# Altium PCB praxis_top_level_pcbdoc_v2_ethernet.PcbDoc
Units mm, origin at the board's own origin, x right, y up, seen from the top; angles counter-clockwise.
Board outline 62.93 x 25.9 mm, 4 copper layers (Top Layer, Int1 (GND), Int2 (PWR), Bottom Layer), stack 1.273 mm thick; 51 components, 266 nets, 142 pads, 68 vias.
Unrouted connection lines stored in the file: 1.
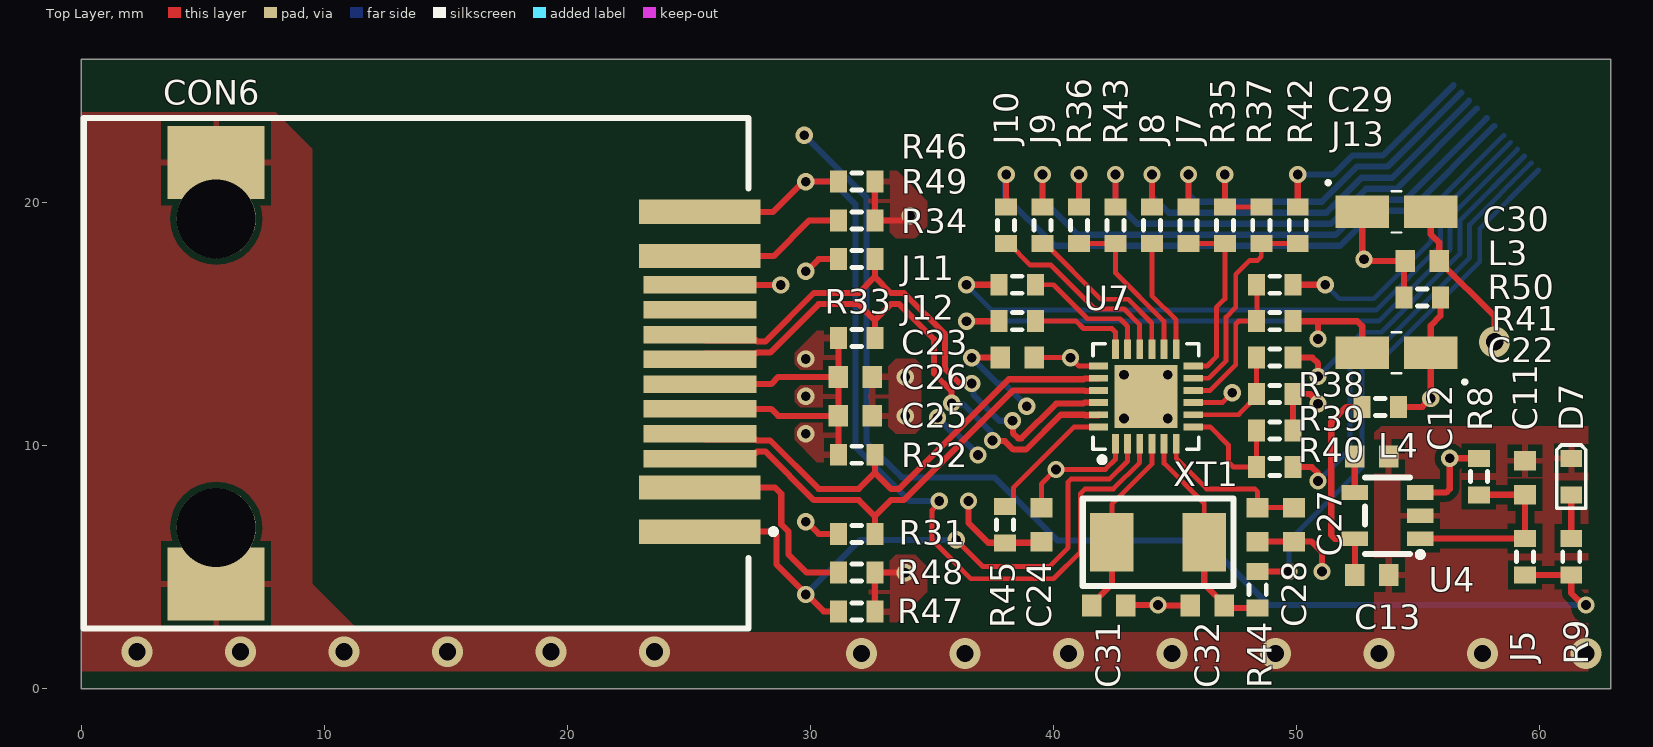
[diagram p0: Top Layer view]
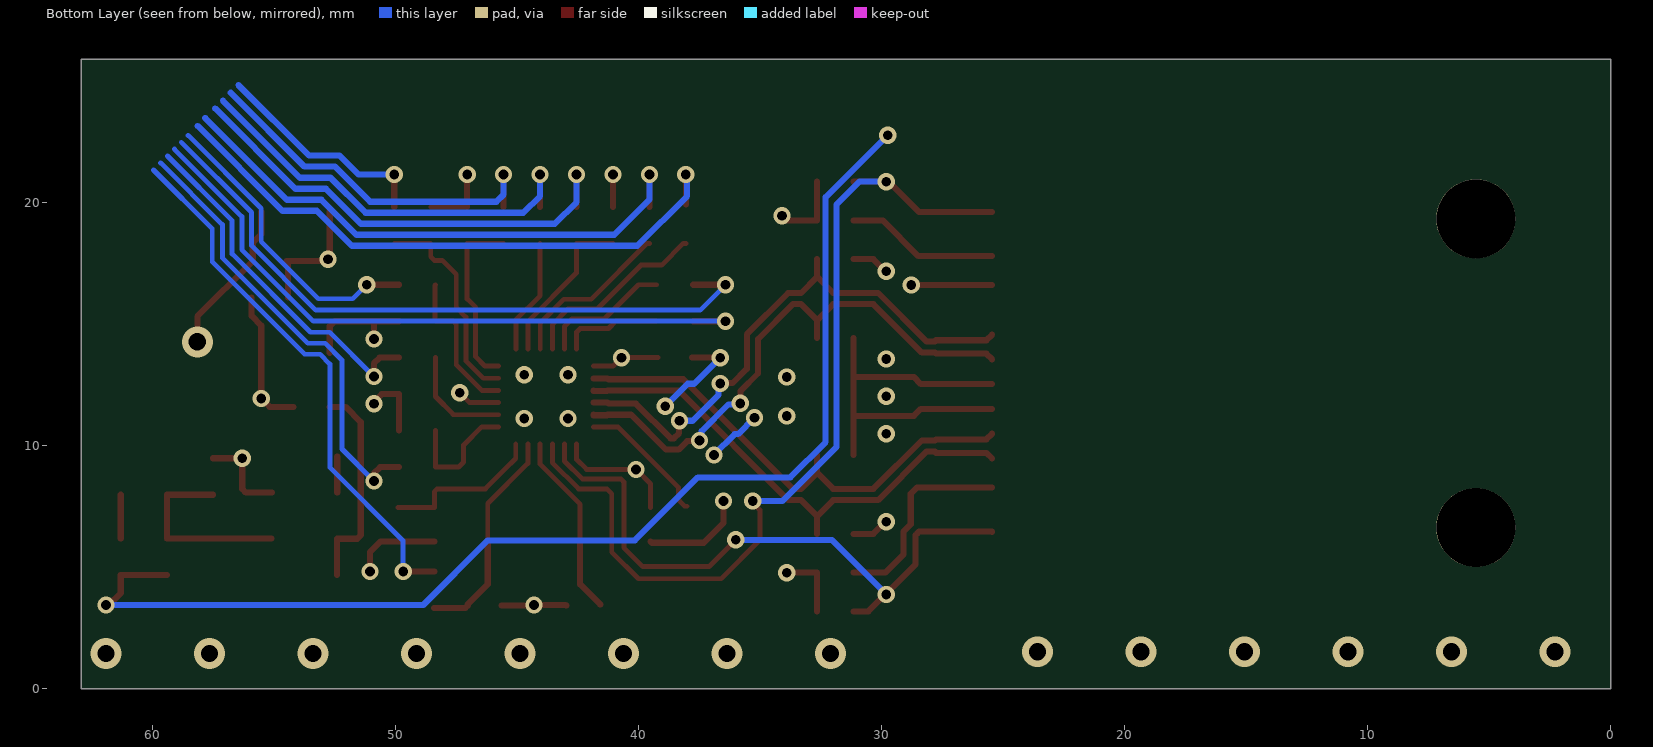
[diagram p1: Bottom Layer view, seen from below]
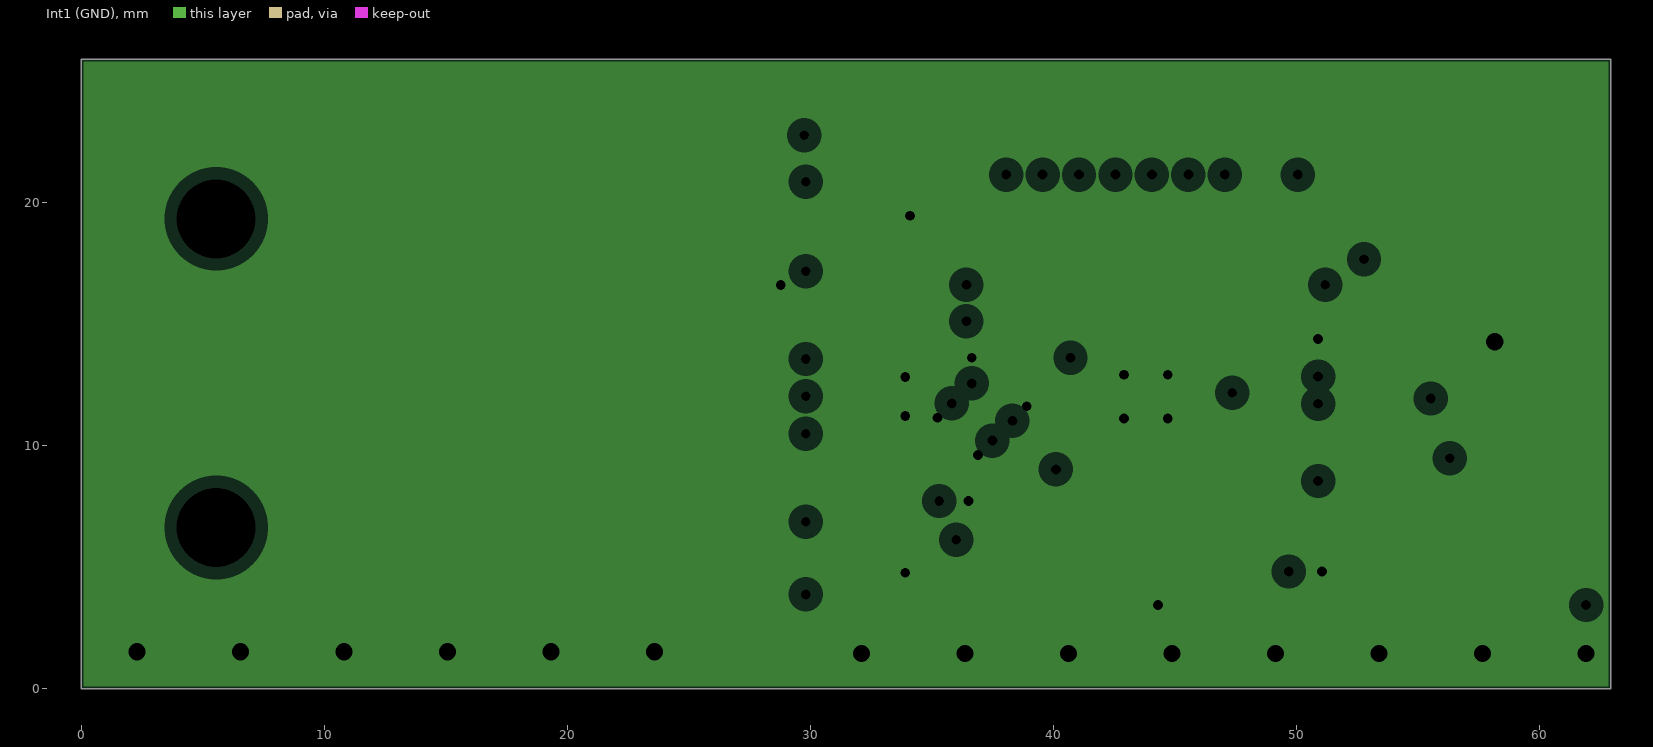
[diagram p2: Int1 (GND), clearances drawn from the general rule]
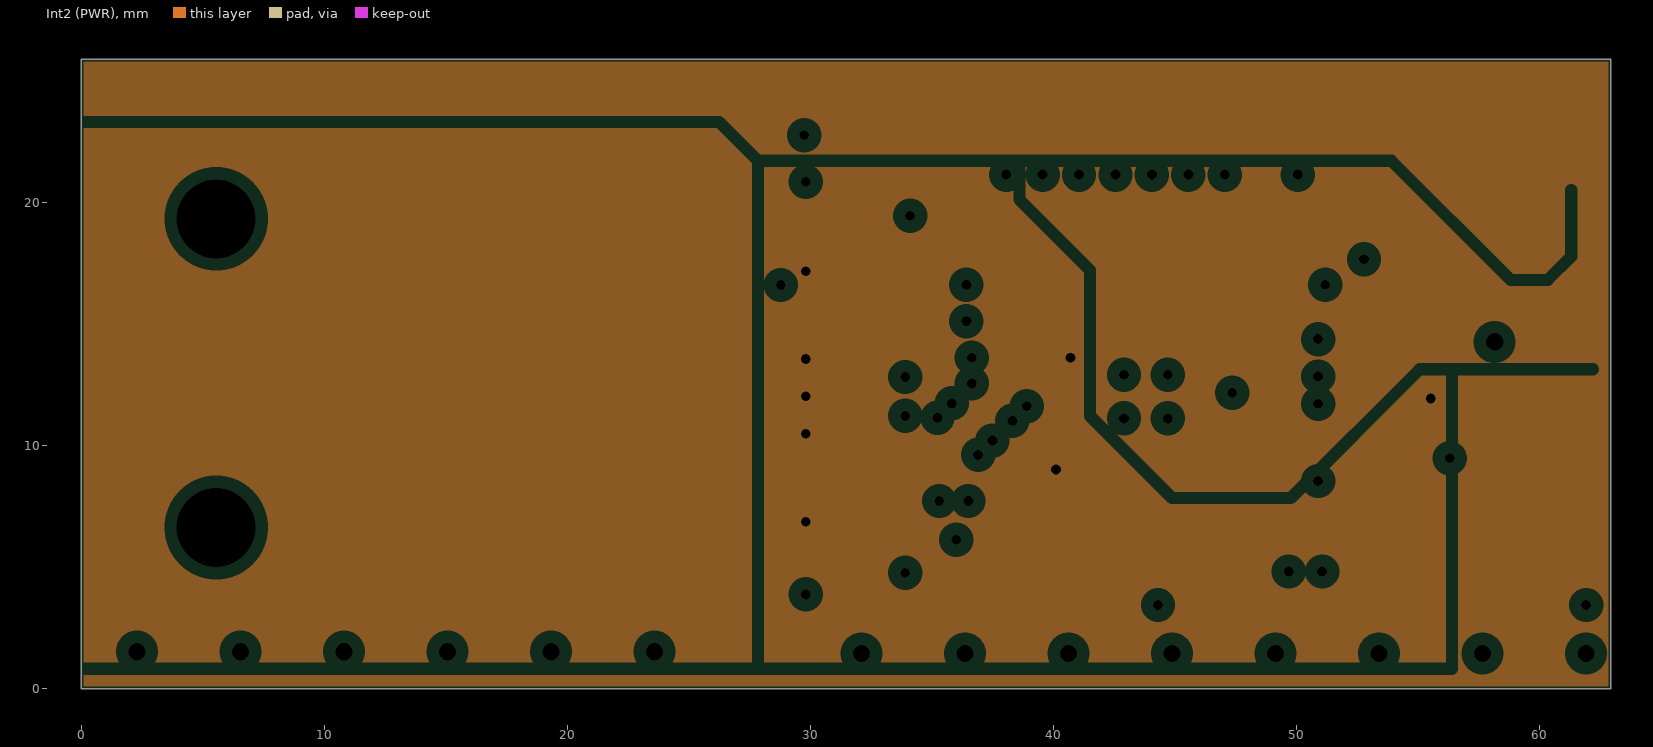
[diagram p3: Int2 (PWR), clearances drawn from the general rule]

## Layer stack, top to bottom
Top Solder: solder mask 0.0254, SM-001, Dk 4
Top Layer: signal copper 0.035
Dielectric 1: prepreg 0.0864, PP-010, Dk 4
Dielectric 2: prepreg 0.0864, PP-010, Dk 4
Int1 (GND): plane copper 0.035, net GND
Dielectric 3: core 0.7874, Core-040, Dk 4.6
Int2 (PWR): plane copper 0.035, net (Multiple Nets)
Dielectric 4: prepreg 0.0864, PP-010, Dk 4
Dielectric 5: prepreg 0.0864, PP-010, Dk 4
Bottom Layer: signal copper 0.035
Bottom Solder: solder mask 0.0254, SM-001, Dk 4

## Board outline
0,0 62.925,0 62.925,25.9 0,25.9

## Design rules (kind name [scope] priority, off if disabled: settings)
Clearance [All] p1: gap=0.254 ignorepadtopadclearanceinfootprint=FALSE except(0: Arc-Hole Track-Hole SMDPad-Hole THPad-Hole Via-Hole Fill-Hole Poly-Hole Region-Hole Text-Hole; 0.2: Arc-Arc Arc-Track Track-Track SMDPad-SMDPad)
DiffPairsRouting DiffPairsRouting_STLINK_USB [InDifferentialPair('DP_STLINK_USB')] p1: maxlimit=0.254 minlimit=0.2 mostfreqgap=0.2 toplayer_minwidth=0.25 toplayer_maxwidth=0.381 toplayer_prefwidth=0.307 bottomlayer_minwidth=0.25 bottomlayer_maxwidth=0.381 bottomlayer_prefwidth=0.307 impedanceprofiledriven=TRUE impedanceprofileid={171DCBC4-E7A9-4E61-9777-8B6F89F70602} impedanceprofilevalue=90.000000 maxuncoupledlength=12.7
DiffPairsRouting DiffPairsRouting_USB_OTG_FS [InDifferentialPairClass('All Differential Pairs')] p2: maxlimit=0.254 minlimit=0.2 mostfreqgap=0.2 toplayer_minwidth=0.25 toplayer_maxwidth=0.381 toplayer_prefwidth=0.307 bottomlayer_minwidth=0.25 bottomlayer_maxwidth=0.381 bottomlayer_prefwidth=0.307 impedanceprofiledriven=TRUE impedanceprofileid={171DCBC4-E7A9-4E61-9777-8B6F89F70602} impedanceprofilevalue=90.000000 maxuncoupledlength=12.7
DiffPairsRouting DiffPairsRouting_ETH_TX [InDifferentialPairClass('DIFFPAIR_EHT_NET_TX')] p3: maxlimit=0.254 minlimit=0.21 mostfreqgap=0.21 toplayer_minwidth=0.25 toplayer_maxwidth=0.381 toplayer_prefwidth=0.25 bottomlayer_minwidth=0.25 bottomlayer_maxwidth=0.381 bottomlayer_prefwidth=0.25 impedanceprofiledriven=TRUE impedanceprofileid={305CB325-F830-419B-A8F2-9C7B33C04CC0} impedanceprofilevalue=100.000000 maxuncoupledlength=12.7
DiffPairsRouting DiffPairsRouting_ETH_RX [InDifferentialPairClass('DIFFPAIR_EHT_NET_RX')] p4: maxlimit=0.254 minlimit=0.21 mostfreqgap=0.21 toplayer_minwidth=0.25 toplayer_maxwidth=0.381 toplayer_prefwidth=0.25 bottomlayer_minwidth=0.25 bottomlayer_maxwidth=0.381 bottomlayer_prefwidth=0.25 impedanceprofiledriven=TRUE impedanceprofileid={305CB325-F830-419B-A8F2-9C7B33C04CC0} impedanceprofilevalue=100.000000 maxuncoupledlength=12.7
MatchedLengths "Schematic Matched Net Lengths_7" [InNet('Port_A11')] p1: tolerance=2.54 checknetsindiffpair=TRUE checkdiffpairvsdiffpair=FALSE checkxsignals=FALSE checkothers=FALSE
MatchedLengths "Schematic Matched Net Lengths_6" [InNet('Port_A12')] p2: tolerance=2.54 checknetsindiffpair=TRUE checkdiffpairvsdiffpair=FALSE checkxsignals=FALSE checkothers=FALSE
MatchedLengths "Schematic Matched Net Lengths_5" [InNet('DP_STLINK_USB_P')] p3: tolerance=2.54 checknetsindiffpair=TRUE checkdiffpairvsdiffpair=FALSE checkxsignals=FALSE checkothers=FALSE
MatchedLengths "Schematic Matched Net Lengths_4" [InNet('DP_STLINK_USB_N')] p4: tolerance=2.54 checknetsindiffpair=TRUE checkdiffpairvsdiffpair=FALSE checkxsignals=FALSE checkothers=FALSE
MatchedLengths "Schematic Matched Net Lengths_3" [InNet('DP_ETH_RX_N')] p5: tolerance=2.54 checknetsindiffpair=TRUE checkdiffpairvsdiffpair=FALSE checkxsignals=FALSE checkothers=FALSE
MatchedLengths "Schematic Matched Net Lengths_2" [InNet('DP_ETH_RX_P')] p6: tolerance=2.54 checknetsindiffpair=TRUE checkdiffpairvsdiffpair=FALSE checkxsignals=FALSE checkothers=FALSE
MatchedLengths "Schematic Matched Net Lengths_1" [InNet('DP_ETH_TX_N')] p7: tolerance=2.54 checknetsindiffpair=TRUE checkdiffpairvsdiffpair=FALSE checkxsignals=FALSE checkothers=FALSE
MatchedLengths "Schematic Matched Net Lengths" [InNet('DP_ETH_TX_P')] p8: tolerance=2.54 checknetsindiffpair=TRUE checkdiffpairvsdiffpair=FALSE checkxsignals=FALSE checkothers=FALSE
PlaneClearance [All] p1: clearance=0.508
PlaneConnect [All] p1: planeconnectstyle=Direct reliefexpansion=0.508 reliefentries=4 reliefconductorwidth=0.254 reliefairgap=0.254
PolygonConnect [All] p1: connectstyle=Relief reliefconductorwidth=0.254 reliefentries=4 polygonreliefangle="90 Angle" airgapwidth=0.254
RoutingVias [All] p1: holewidth=0.711 width=1.27 viastyle="Through Hole" minholewidth=0.4 minwidth=0.711 maxholewidth=0.711 maxwidth=1.27
SolderMaskExpansion [All] p1: expansion=0.102 istentingtop=FALSE
Width [All] p1: maxlimit=0.254 minlimit=0.15 preferedwidth=0.254 minimp=50.000000 maximp=50.000000 favimp=50.000000
27 further rules are at their usual default settings.

## Classes and differential pairs
net class Port_H[0..1]: Port_H0 Port_H1
net class Port_G[0..15]: Port_G0 Port_G1 Port_G2 Port_G3 Port_G4 Port_G5 Port_G6 Port_G7 Port_G8 Port_G9 Port_G10 Port_G11 Port_G12 Port_G13 Port_G14 Port_G15
net class Port_F[0..15]: Port_F0 Port_F1 Port_F2 Port_F3 Port_F4 Port_F5 Port_F6 Port_F7 Port_F8 Port_F9 Port_F10 Port_F11 Port_F12 Port_F13 Port_F14 Port_F15
net class Port_E[0..15]: Port_E0 Port_E1 Port_E2 Port_E3 Port_E4 Port_E5 Port_E6 Port_E7 Port_E8 Port_E9 Port_E10 Port_E11 Port_E12 Port_E13 Port_E14 Port_E15
net class Port_D[0..15]: Port_D0 Port_D1 Port_D2 Port_D3 Port_D4 Port_D5 Port_D6 Port_D7 Port_D8 Port_D9 Port_D10 Port_D11 Port_D12 Port_D13 Port_D14 Port_D15
net class Port_C[0..15]: Port_C0 Port_C1 Port_C2 Port_C3 Port_C4 Port_C5 Port_C6 Port_C7 Port_C8 Port_C9 Port_C10 Port_C11 Port_C12 Port_C13 Port_C14 Port_C15
net class Port_B[0..15]: Port_B0 Port_B1 Port_B2 Port_B3 Port_B4 Port_B5 Port_B6 Port_B7 Port_B8 Port_B9 Port_B10 Port_B11 Port_B12 Port_B13 Port_B14 Port_B15
net class Port_A[0..15]: Port_A0 Port_A1 Port_A2 Port_A3 Port_A4 Port_A5 Port_A6 Port_A7 Port_A8 Port_A9 Port_A10 Port_A11 Port_A12 Port_A13 Port_A14 Port_A15
differential pair class NET_CLASS_DP_STLINK_USB: DP_STLINK_USB
differential pair class DIFFPAIR_EHT_NET_TX: DP_ETH_TX
differential pair class DIFFPAIR_EHT_NET_RX: DP_ETH_RX
component class U_modulo_comunicacion_schdoc: C22 C23 C24 C25 C26 C27 C28 C29 C30 C31 C32 CON6 J7 J8 J9 J10 J11 J12 J13 L3 L4 R31 R32 R33 R34 R35 R36 R37 R38 R39 R40 R41 R42 R43 R44 R45 R46 R47 R48 R49 R50 U7 XT1
component class U_modulo_alimentador_schdoc: C11 C12 C13 D7 J5 R8 R9 U4
differential pair DP_STLINK_USB: +DP_STLINK_USB_P -DP_STLINK_USB_N
differential pair DP_ETH_TX: +DP_ETH_TX_P -DP_ETH_TX_N
differential pair DP_ETH_RX: +DP_ETH_RX_P -DP_ETH_RX_N

## Components (designator, comment, footprint, x,y, rotation, side; value= is the part's Value field where it differs from the comment)
C11 "Cap Semi" 1608[0603] 59.4,8.683 r90 top value=100pF
C12 "Cap Semi" 1608[0603] 53.091,9.558 r0 top value=100pF
C13 "Cap Semi" 1608[0603] 53.1,4.683 r0 top value=100pF
C22 "TANT" T491A475K010AT7280 55.52,13.825 r180 top
C23 "Cap Semi" 1608[0603] 38.5,13.625 r0 top value=100nF
C24 "Cap Semi" 1608[0603] 39.5,6.758 r90 top value=100nF
C25 "Cap Semi" 1608[0603] 31.851,11.235 r180 top value=100nF
C26 "Cap Semi" 1608[0603] 31.851,12.829 r180 top value=100nF
C27 "Cap Semi" 1608[0603] 49.9,6.758 r90 top value=1uF
C28 "Cap Semi" 1608[0603] 48.4,6.758 r90 top value=470pF
C29 "TANT" T491A475K010AT7280 52.7,19.625 r0 top
C30 "Cap Semi" 1608[0603] 55.168,17.6 r180 top value=100nF
C31 "Cap Semi" 1608[0603] 42.275,3.425 r180 top value=30pF
C32 "Cap Semi" 1608[0603] 46.325,3.425 r0 top value=30pF
CON6 "ARJE-0034" ARJE-0034 15.5,12.985 r90 top
D7 "LTST-C191KRKT" LTST-C191KRKT 61.3,7.983 r90 top
J5 "JUMPER_SMD_0603" JUMPER_SMD_0603 59.4,4.683 r90 top
J7 "JUMPER_SMD_0603" JUMPER_SMD_0603 45.55,19.825 r270 top
J8 "JUMPER_SMD_0603" JUMPER_SMD_0603 44.05,19.825 r270 top
J9 "JUMPER_SMD_0603" JUMPER_SMD_0603 39.55,19.825 r270 top
J10 "JUMPER_SMD_0603" JUMPER_SMD_0603 38.05,19.825 r270 top
J11 "JUMPER_SMD_0603" JUMPER_SMD_0603 37.75,16.625 r0 top
J12 "JUMPER_SMD_0603" JUMPER_SMD_0603 37.75,15.125 r0 top
J13 "JUMPER_SMD_0603" JUMPER_SMD_0603 49.85,16.625 r180 top
L3 "GLRF1608T101M-LR" GLRF1608T101M-LR 54.418,16.1 r0 top
L4 "GLRF1608T101M-LR" GLRF1608T101M-LR 54.2,11.6 r180 top
R8 "Res3" J1-0603 57.5,8.733 r270 top value=10K
R9 "Res3" J1-0603 61.3,5.433 r270 top value=100
R31 "Res3" J1-0603 31.901,6.373 r180 top value=50
R32 "Res3" J1-0603 31.901,9.631 r180 top value=50
R33 "Res3" J1-0603 31.901,14.433 r180 top value=50
R34 "Res3" J1-0603 31.901,17.677 r180 top value=50
R35 "Res3" J1-0603 47.05,19.075 r90 top value=1K5
R36 "Res3" J1-0603 41.05,19.075 r90 top value=10K
R37 "Res3" J1-0603 48.55,19.075 r90 top value=10K
R38 "Res3" J1-0603 49.1,12.125 r0 top value=10K
R39 "Res3" J1-0603 49.1,10.625 r0 top value=10K
R40 "Res3" J1-0603 49.1,9.125 r0 top value=33
R41 "Res3" J1-0603 49.1,13.625 r180 top value=33
R42 "Res3" J1-0603 50.05,19.075 r90 top value=33
R43 "Res3" J1-0603 42.55,19.075 r90 top value=33
R44 "Res3" J1-0603 48.4,4.075 r90 top value=33
R45 "Res3" J1-0603 38,6.758 r90 top value=12K1
R46 "Res3" J1-0603 31.901,20.867 r180 top value=10K
R47 "Res3" J1-0603 31.901,3.183 r180 top value=10K
R48 "Res3" J1-0603 31.901,4.778 r180 top value=270
R49 "Res3" J1-0603 31.901,19.272 r180 top value=270
R50 "Res3" J1-0603 49.1,15.125 r180 top value=10K
U4 "MIC5301-3.3YD5-TR" MIC5301-3.3YD5-TR 53.741,7.122 r180 top
U7 "LAN8742A-CZ" LAN8742A-CZ 43.8,12.025 r90 top
XT1 "E5FA25" E5FA25 42.4,6.033 r0 top

## Footprints (in the part's own frame and the unit in brackets; to place one, negate y for a bottom-side part, rotate by r counter-clockwise, add the part's x,y. Pads: shape width x height; smd on the part's side, far side on the other; paste and mask are expansions set on the pad)
1608[0603] [mm] "Chip Capacitor, Body 1.6x0.8mm, IPC High Density"
  rect 0.8x0.9 smd: 1(-0.7,0) 2(0.7,0)
  body extent -0.87,-0.48 0.87,0.48, height 1.3
ARJE-0034 [mm] "CONECTOR RJ45 MAGNETICO"
  rect 1x5 smd paste+0: 1(-6.52,-9.953) 2(-4.7,-9.953) 11(4.82,-9.953) 12(6.64,-9.953)
  rect 0.72x4.65 smd paste+0 mask+0.05: 3(-3.51,-9.953) 4(-2.49,-9.953) 5(-1.47,-9.953) 6(-0.45,-9.953) 7(0.57,-9.953) 8(1.59,-9.953) 9(2.61,-9.953) 10(3.63,-9.953)
  rect 3x4 smd: 13(8.67,9.953) 14(-8.67,9.953)
  round 3.251 hole 3.251: 15(6.35,9.953) 16(-6.35,9.953)
  silkscreen extent -10.5,-13.08 10.5,15.4, body extent -10.26,-12.04 10.4,15.24, height 16.75
E5FA25 [mm]
  rect 1.8x2.4 smd: 1(0,0) 2(3.8,0)
  silkscreen extent -1.2,-1.8 5,1.8, body extent -0.6,-1.6 4.4,1.6, height 1.4
GLRF1608T101M-LR [mm]
  rect 0.7x0.9 smd: 1(0,0) 2(1.5,0)
  silkscreen extent 0.55,-0.35 0.95,0.35, body extent -0.05,-0.4 1.55,0.4, height 0.79
J1-0603 [mm] "Chip Resistor, Body 1.6x0.8mm, IPC High Density"
  rect 0.7x0.9 smd: 1(-0.75,0) 2(0.75,0)
  silkscreen extent -0.2,-0.35 0.2,0.35, body extent -0.85,-0.48 0.85,0.48, height 0.9
JUMPER_SMD_0603 [mm]
  rect 0.7x0.9 smd: 1(0,0) 2(1.5,0)
  silkscreen extent 0.55,-0.35 0.95,0.35, body extent -0.05,-0.4 1.55,0.4, height 0.45
LAN8742A-CZ [mm]
  rect 0.8x0.28 smd paste+0 mask+0.05: 1(-1.95,1.25) 2(-1.95,0.75) 3(-1.95,0.25) 4(-1.95,-0.25) 5(-1.95,-0.75) 6(-1.95,-1.25) 13(1.95,-1.25) 14(1.95,-0.75) 15(1.95,-0.25) 16(1.95,0.25) 17(1.95,0.75) 18(1.95,1.25)
  rect 0.28x0.8 smd paste+0 mask+0.05: 7(-1.25,-1.95) 8(-0.75,-1.95) 9(-0.25,-1.95) 10(0.25,-1.95) 11(0.75,-1.95) 12(1.25,-1.95) 19(1.25,1.95) 20(0.75,1.95) 21(0.25,1.95) 22(-0.25,1.95) 23(-0.75,1.95) 24(-1.25,1.95)
  rect 2.591x2.591 smd paste-1.283 mask+0.05: 25(0,0)
  silkscreen extent -2.7,-2.17 2.17,2.17, body extent -2.05,-2.05 2.05,2.05, height 1.39
LTST-C191KRKT [mm]
  rect 0.7x0.9 smd: 1(0,0) 2(1.5,0)
  silkscreen extent -0.55,-0.6 2.05,0.6, body extent -0.1,-0.45 1.6,0.45, height 0.88
MIC5301-3.3YD5-TR [mm]
  rect 1.1x0.6 smd: 1(-1.35,0.947) 2(-1.35,-0.003) 3(-1.35,-0.953) 4(1.35,-0.953) 5(1.35,0.947)
  silkscreen extent -1.45,-1.58 0.93,1.7, body extent -1.4,-1.45 1.4,1.45, height 0.98
T491A475K010AT7280 [mm] "CAP TANT 4.7UF 10% 10V 1206"
  rect 2.2x1.35 smd: 1(0,0) 2(2.82,0)
  silkscreen extent -1.45,-0.85 1.61,1.25, body extent -0.27,-0.9 3.13,0.9, height 1.8

## Part data
C11 C12 C13 C23 C24 C25 C26 C27 C28 C30 C31 C32: "Capacitor (Semiconductor SIM Model)", LatestRevisionDate=29-May-2009, LatestRevisionNote="IPC-7351 Footprint Added.", PackageDescription="Chip Capacitor", PackageReference=C1206, Published=8-Jun-2000, Publisher="Altium Limited"
C22 C29: library part T491A475K010AT7280, "CAP TANT 4.7UF 10% 10V 1206", Capacitance=10uF, Case Code (Imperial)=1206, Case Code (Metric)=3216, ESR (Equivalent Series Resistance)=5R, Manufacturer=KEMET, Max Operating Temperature=125°C, Min Operating Temperature=-55°C, Tolerance=10%, Voltage Rating=10V, Case/Package=1206, Category="Tantalum Capacitors", ComponentLink1Description=https://datasheet.ciiva.com/12885/kem-t2005-t491-12885625.pdf?src-supplier=Mouser, ComponentLink1URL=https://datasheet.ciiva.com/12885/kem-t2005-t491-12885625.pdf?src-supplier=Mouser, Depth=1.6mm, Height=1.8mm, Lead Free="Lead Free", Length=3.2mm, Manufacturer Part Number=T491A475K010AT7280, Packaging="Tape and Reel", Pricing 1="1=0,44000, 10=0,30800, 50=0,21520, 100=0,18450, 500=0,13838, 1000=0,11685, 2500=0,11070 (USD)", Radiation Hardening=No, RoHS=Yes, Stock 1=6630, Supplier 1=Digi-Key, Termination=SMD/SMT, Weight=0.000571oz, Width=1.6mm
CON6: library part ARJE-0034_MOD, "CONECTOR RJ45 MAGNETICO", Color=Green,Yellow, Current Rating=8mA, Manufacturer=Abracon, Max Operating Temperature=70°C, Min Operating Temperature=0°C, Package Quantity=1, Supplier Part Number 1=535-12443-1-ND, Category="Modular / Ethernet Connectors", CON RJ45=ARJE-0034, Connector Type=RJ45, Direction=Up, Gender=Male, Lead Free="Lead Free", Manufacturer Part Number=ARJE-0034, Mount="Surface Mount", Number of Contacts=8, Number of Cores per Jack=4, Number of Ports=1, Number of Positions=12, Number of Rows=1, Orientation="Right Angle", Packaging="Tape and Reel", Pitch=1.02mm, Radiation Hardening=No, Shielding=Shielded, Supplier 1=Digi-Key, Termination=Solder
D7: "DIODO LED ROJO 0603", Case Code (Imperial)=0603, Case Code (Metric)=1608, Color=Red, Forward Current=30mA, Forward Voltage=2V, Lens Color=Colorless, Manufacturer="Vishay Lite-On", Max Operating Temperature=85°C, Min Operating Temperature=-55°C, Package Quantity=1, Power Dissipation=75mW, Reverse Voltage=5V, Test Current=20mA, Case/Package=0603, Category=LEDs, Depth=0.8mm, Dominant Wavelength=631nm, Height=0.55mm, Illumination Color=Red, Lead Free="Lead Free", Length=1.6mm, Lens Style=Clear,Diffused,Colorless,Rectangular, Lens Transparency=Clear, Luminous Intensity=54mcd, Manufacturer Part Number=LTST-C191KRKT, Mount="Surface Mount", Number of Elements=1, Number of LEDs=1, Number of Pins=2, Packaging="Tape and Reel", Power Rating=75mW, Radiation Hardening=No, Supplier 1=Digi-Key, Viewing Angle=130°, Voltage=2V, Wavelength=639nm, Width=0.8mm
J5: "RES 0 OHM JUMPER 1/10W 0603", Supplier 1=Avnet
L3 L4: "FIXED IND 100uH 80MA 5.5 OHM SMD", Case Code (Imperial)=0603, Case Code (Metric)=1608, Current Rating=25mA, DC Current=80mA, DC Resistance (DCR)=5.5R, Inductance=100uH, Manufacturer=TDK, Manufacturer Part Number=GLFR1608T101M-LR, Max Operating Temperature=105°C, Min Operating Temperature=-40°C, Package Quantity=4000, Tolerance=20%, Case/Package=0603, Category="Fixed Inductors", ComponentLink1Description=https://datasheet.ciiva.com/1040/glfrseries-1040797.pdf?src-supplier=Digi-Key, ComponentLink1URL=https://datasheet.ciiva.com/1040/glfrseries-1040797.pdf?src-supplier=Digi-Key, ComponentLink2Description=https://datasheet.ciiva.com/1040/glfrseries-1040798.pdf?src-supplier=Digi-Key, ComponentLink2URL=https://datasheet.ciiva.com/1040/glfrseries-1040798.pdf?src-supplier=Digi-Key, ComponentLink3Description=https://datasheet.ciiva.com/1040/glfrseries-1040799.pdf?src-supplier=Digi-Key, ComponentLink3URL=https://datasheet.ciiva.com/1040/glfrseries-1040799.pdf?src-supplier=Digi-Key, Depth=1mm, Height=0.031inch, Lead Free="Lead Free", Length=0.063inch, Max DC Current=80mA, Military Standard=Not, Mount="Surface Mount", Packaging="Tape and Reel", Pricing 1="1=0,27000, 10=0,24400, 100=0,16760, 500=0,14324, 1000=0,10971 (USD)", RoHS=Yes, Saturation Current=25mA, Shielding=Shielded, Stock 1=31108, Supplier 1=Digi-Key, Termination=SMD/SMT, Width=0.8mm
R8 R9 R31 R32 R33 R34 R35 R36 R37 R38 R39 R40 R41 R42 R43 R44 R45 R46 R47 R48 R49 R50: "Resistor", LatestRevisionDate=29-May-2009, LatestRevisionNote="IPC-7351 Footprint Added.", PackageDescription="Chip Resistor", PackageReference=J1-0603, Published=8-Jun-2000, Publisher="Altium Limited"
U4: "LDO VOLT REG, 0.15A, 3.3V, TSOT-23-5; Input Voltage Min:2.3V; Input Voltage Max:5.5V; Output Voltage Nom.:3.3V; Output Current:150mA; Dropout Voltage Vdo:40mV; LDO Regulator Case Style:TSOT-23; No. of Pins:5; Operating Temperature Min:-40°C; Operating Temperature Max:125°C; Packaging:Cut Tape; MSL:MSL 1 - Unlimited; SVHC:No SVHC (15-Jun-2015)", Manufacturer=Microchip, Category="Voltage Regulators - Linear", ComponentLink1Description=https://datasheet.ciiva.com/2049/mic5301-2049830.pdf?src-supplier=Digi-Key, ComponentLink1URL=https://datasheet.ciiva.com/2049/mic5301-2049830.pdf?src-supplier=Digi-Key, ComponentLink2Description=https://datasheet.ciiva.com/46425/1670788-46425623.pdf?src-supplier=Element14, ComponentLink2URL=https://datasheet.ciiva.com/46425/1670788-46425623.pdf?src-supplier=Element14, Manufacturer Part Number=MIC5301-3.3YD5-TR, Pricing 1="1=0,59000, 25=0,49000, 100=0,45000 (USD)", RoHS=Yes, Stock 1=2373, Supplier 1=Digi-Key
U7: library part LAN8742A-CZ_MOD, "IC TRANSCEIVER 1/1 24SQFN", Manufacturer=Microchip, Supplier Part Number 1=LAN8742A-CZ-ND, Category="Interface ICs", Manufacturer Part Number=LAN8742A-CZ, Supplier 1=Digi-Key
XT1: "E5FA 25.0000 F15 E33", Supplier Part Number 1=E5FA25.0000F16D55, Supplier 1="Future Electronics"
J7 J8 J9 J10 J11 J12 J13: Supplier 1=Digi-Key

## Via types
v1: diameter 0.711, hole 0.4, Top Layer to Bottom Layer, 53 vias
v2: diameter 1.27, hole 0.711, Top Layer to Bottom Layer, 15 vias

## Nets (pads, with @x,y where several pads share a name; then routed paths per layer and width w, separated by ;. In a path a pad name is that pad's centre, name@x,y a point inside that pad or via, vN(x,y) a via of type N, cw(c..) or ccw(c..) an arc to the next point about the centre after c; other vN are vias at no path point)
+3V3_MCP1825: C29.1 C30.2 L3.1 R35.2 R36.2 R37.2 R38.2 R39.2 U7.9 | length 13.9
  Top Layer w0.2: U7.9 46.95,11.775 v1(47.36,12.185) ; R35.2 R37.2
  Top Layer w0.254: R36.2 v1(41.05,21.157) ; R35.2 v1(47.05,21.157) ; R39.2 R38.2 50.569,12.125 50.885,11.808 v1(50.885,11.725) ; C29.1 52.7,17.75 52.85,17.6 C30.2 54.418,17.55 L3.1
  other v1: 52.775,17.675
+3V3_MIC5301: C13.1 L4.2 U4.5 | length 8.7
  Top Layer w0.254: U4.5 51.574,6.175 51.425,6.324 51.425,10.976 52.049,11.6 L4.2 ; C13.1 U4.5@52.4,6.166
+3V3_SPI: 
+3V3_SPI_FUSE: 
+3V3_STLINK: 
+5V: J5.1 R9.2 | length 49.5
  Top Layer w0.254: J5.1 R9.2 61.3,3.937 61.789,3.448 v1(61.912,3.448)
  Bottom Layer w0.254: v1(29.75,22.775) 32.301,20.224 32.301,10.149 33.75,8.7 37.558,8.7 40.156,6.102 46.2,6.102 48.854,3.448 v1(61.912,3.448)
+5V_BAT: 
+5V_OTG_FS: 
+5V_SPI: 
+5V_SPI_FUSE: 
+5V_STLINK: 
+5V_USB_STLINK: 
+12V: 
+12V_FUSE: 
+12V_JACK: 
AIN_1: 
BOOT0: 
BYPASS: 
C/E: 
CAN_H: 
CAN_L: 
CT: C22.1 C23.2 C24.2 C25.2 C26.2 CON6.5 CON6.6 L3.2 L4.1 R31.2 R32.2 R33.2 R34.2 U7.1 U7.19 | length 33.2
  Top Layer w0.2: C23.2 v1(40.7,13.625) 41.05,13.275 U7.19 ; C24.2 39.5,8.425 v1(40.1,9.025) 42.134,9.025 42.55,9.441 U7.1
  Top Layer w0.254: CON6.5 28.378,11.515 28.667,11.226 C25.2@31.151,11.226 ; CON6.6 28.378,12.535 28.672,12.829 C26.2 ; v1(29.803,6.873) 29.844,6.873 30.344,6.373 R31.2 ; v1(29.803,17.177) 29.844,17.177 30.344,17.677 R34.2 ; R32.2 C25.2@31.151,11.226 ; R33.2 C26.2 ; L4.1 55.175,11.6 v1(55.52,11.945) C22.1 55.52,14.945 55.918,15.343 L3.2 ; C25.2@31.151,11.226 C25.2 C26.2
  other v1: 29.803,10.495 29.803,12.032 29.803,13.569
DP_ETH_RX_N: CON6.8 R34.1 U7.22 | length 23.1
  Top Layer w0.25: CON6.8 25.688,14.34 27.754,14.34 27.799,14.295 28.153,14.295 30.143,16.285 31.991,16.285 32.651,16.945 ; R34.1 32.651,16.945 ; v1(36.639,12.564) 36.621,12.583 36.125,12.583 35.544,13.163 35.544,14.581 33.84,16.285 33.311,16.285 32.651,16.945 ; v1(38.309,11.034) 38.327,11.016 38.327,10.519 38.543,10.303 38.678,10.303 40.11,11.735 41.234,11.735 41.274,11.775 U7.22
  Bottom Layer w0.25: v1(36.639,12.564) 36.704,12.5 36.704,12.096 37.771,11.029 38.304,11.029 v1(38.309,11.034)
DP_ETH_RX_P: CON6.7 R33.1 U7.23 | length 23
  Top Layer w0.25: CON6.7 25.688,13.79 27.754,13.79 27.799,13.835 28.343,13.835 30.333,15.825 31.991,15.825 32.651,15.165 ; R33.1 32.651,15.165 ; v1(35.818,11.743) 35.799,11.761 35.799,12.257 35.084,12.972 35.084,14.39 33.649,15.825 33.311,15.825 32.651,15.165 ; v1(37.487,10.212) 37.506,10.194 38.002,10.194 38.353,9.843 38.869,9.843 40.301,11.275 41.274,11.275 41.293,11.256 41.85,11.256 U7.23
  Bottom Layer w0.25: v1(35.818,11.743) 35.864,11.696 36.304,11.696 37.399,10.601 37.399,10.301 v1(37.487,10.212)
DP_ETH_TX_N: CON6.4 R32.1 U7.20 | length 20.5
  Top Layer w0.25: CON6.4 25.688,10.26 27.754,10.26 27.799,10.215 28.343,10.215 30.333,8.225 31.991,8.225 32.651,8.885 ; R32.1@32.651,9.617 32.651,8.885 ; U7.20 41.274,12.775 41.234,12.735 38.159,12.735 33.649,8.225 33.311,8.225 32.651,8.885
DP_ETH_TX_P: CON6.3 R31.1 U7.21 | length 20.5
  Top Layer w0.25: CON6.3 25.688,9.71 27.754,9.71 27.799,9.755 28.153,9.755 30.143,7.765 31.991,7.765 32.651,7.105 ; R31.1 32.651,7.105 ; U7.21 41.85,12.256 41.293,12.256 41.274,12.275 38.35,12.275 33.84,7.765 33.311,7.765 32.651,7.105
DP_STLINK_USB_N: 
DP_STLINK_USB_P: 
EN: R8.1 U4.3 | length 3.7
  Top Layer w0.254: U4.3 56.151,8.075 56.3,8.224 v1(56.3,9.483) R8.1
GND: C11.2 C12.2 C13.2 C22.2 C23.1 C24.1 C25.1 C26.1 C27.1 C28.1 C29.2 C30.1 C31.1 C32.1 CON6.10 CON6.13 CON6.14 D7.2 R45.1 R46.1 R47.1 R48.1 R49.1 R50.1 U4.2 U7.25 | length 37.7
  Top Layer w0.254: CON6.10 v1(28.778,16.615) ; R47.1 R48.1 v1(33.903,4.778) ; R46.1 R49.1 33.903,19.272 v1(34.099,19.468) ; v1(36.5,7.725) 36.5,6.825 37.317,6.008 R45.1 39.45,6.008 C24.1 ; v1(36.639,13.625) C23.1 ; C31.1 42.998,3.448 v1(44.3,3.448) ; v1@44.3,3.425 C32.1 ; C28.1 C27.1 50.617,6.058 51.05,5.625 v1(51.05,4.825) v1@51.05,4.775 ; R50.1 50.885,15.125 ; v1(50.885,14.389) 50.885,15.125 ; C22.2 52.7,14.925 52.5,15.125 50.885,15.125 ; C29.2 55.52,18.705 55.868,18.357 C30.1 58.15,15.318 v2(58.15,14.275)
  Bottom Layer w0.254: v1(35.227,11.152) 35.233,11.152 35.904,10.48 36.037,10.48 v1(36.896,9.621) ; v1(36.639,13.625) 37.714,12.55 37.975,12.55 v1(38.9,11.625)
  other v1: 42.9,11.125 44.7,11.125 33.903,11.226 33.903,12.829 42.9,12.925 44.7,12.925
  other v2: 32.1,1.45 36.359,1.45 40.618,1.45 44.876,1.45 49.135,1.45 53.394,1.45 57.653,1.45 61.912,1.45 2.288,1.525 6.547,1.525 10.806,1.525 15.065,1.525 19.324,1.525 23.582,1.525
INHIBIT: 
LED_STLINK: 
NetC1_2: 
NetC7_2: 
NetC8_2: 
NetC9_2: 
NetC11_1: C11.1 J5.2 R8.2 U4.1 | length 8
  Top Layer w0.254: U4.1@55.095,6.179 59.396,6.179 J5.2 C11.1 R8.2
NetC12_1: C12.1 U4.4 | length 1.5
  Top Layer w0.254: U4.4 C12.1
NetC20_2: 
NetC21_2: 
NetC27_2: C27.2 C28.2 U7.6 | length 6.7
  Top Layer w0.2: U7.6 45.05,9.475 45.5,9.025 46.3,8.225 48.283,8.225 48.4,8.108 C28.2 C27.2
NetC31_2: C31.2 U7.4 XT1.1 | length 7.6
  Top Layer w0.2: XT1.1 42.4,7.594 44.05,9.244 U7.4
  Top Layer w0.254: C31.2@41.575,3.475 42.4,4.3 XT1.1
NetC32_2: C32.2 R44.1 U7.5 XT1.2 | length 9
  Top Layer w0.2: U7.5 44.55,9.275 46.2,7.625 XT1.2
  Top Layer w0.254: XT1.2 46.2,4.3 C32.2@47.025,3.475 ; C32.2 47.125,3.325 R44.1
NetC36_2: 
NetC56_1: 
NetC63_1: 
NetC64_1: 
NetC65_1: 
NetC71_2: 
NetCON6_1: CON6.1 R47.2 U7.2 | length 26.5
  Top Layer w0.2: v1(36.002,6.127) 36.002,6.123 37.1,5.025 39.818,5.025 40.6,5.807 40.6,8.508 40.717,8.625 42.3,8.625 43.044,9.369 U7.2@43.044,10.069
  Top Layer w0.254: CON6.1 25.463,6.475 28.45,6.475 28.524,6.401 28.6,6.325 28.6,5.125 30.542,3.183 R47.2
  Bottom Layer w0.254: v1(29.803,3.883) 32.044,6.125 v1@36,6.125
NetCON6_2: CON6.2 R48.2 | length 8.4
  Top Layer w0.254: CON6.2 28.54,8.285 28.8,8.025 28.8,6.767 29.1,6.467 29.1,5.525 29.847,4.778 R48.2
NetCON6_11: CON6.11 R49.2 | length 6.3
  Top Layer w0.254: CON6.11 28.48,17.805 29.947,19.272 R49.2
NetCON6_12: CON6.12 R46.2 U7.3 | length 38.1
  Top Layer w0.2: v1(35.3,7.725) 35.3,7.652 35,7.352 35,6.125 36.6,4.525 40,4.525 41.1,5.625 41.1,8.025 41.3,8.225 42.466,8.225 43.544,9.303 U7.3@43.544,10.069
  Top Layer w0.254: CON6.12@25.463,19.615 28.45,19.615 29.702,20.867 v1(29.803,20.867) R46.2
  Bottom Layer w0.254: v1(29.803,20.867) 30.908,20.867 31.847,19.928 31.847,9.961 34.083,7.725 v1(35.3,7.725)
NetCON7_4: 
NetCON12_9: 
NetD5_2: 
NetD7_1: D7.1 R9.1 | length 1.8
  Top Layer w0.254: R9.1 D7.1
NetD8_1: 
NetD9_1: 
NetD10_1: 
NetD12_2: 
NetD13_2: 
NetD14_2: 
NetD15_2: 
NetD16_2: 
NetD17_2: 
NetD18_2: 
NetD19_2: 
NetD20_2: 
NetD21_1: 
NetD21_2: 
NetD22_1: 
NetD23_1: 
NetD23_2: 
NetD24_1: 
NetD25_1: 
NetD26_1: 
NetD27_1: 
NetD28_1: 
NetD29_1: 
NetD30_1: 
NetD31_1: 
NetJ7_2: J7.2 R35.1 U7.12 | length 7.4
  Top Layer w0.2: J7.2 R35.1 47.05,16.042 46.7,15.692 46.7,13.66 46.315,13.275 U7.12
NetJ8_2: J8.2 U7.13 | length 4.8
  Top Layer w0.2: J8.2 44.05,16.175 45.044,15.181 U7.13@45.044,13.981
NetJ9_2: J9.2 U7.15 | length 6.9
  Top Layer w0.2: J9.2 39.65,18.325 41.95,16.025 43.069,16.025 44.044,15.05 U7.15@44.044,13.981
NetJ10_2: J10.2 U7.16 | length 7.9
  Top Layer w0.2: J10.2 38.15,18.325 39.046,17.429 39.896,17.429 41.7,15.625 42.903,15.625 43.544,14.984 U7.16@43.544,13.981
NetJ11_2: J11.2 U7.17 | length 5.4
  Top Layer w0.2: J11.2 40,16.625 41.4,15.225 42.737,15.225 43.044,14.918 U7.17@43.044,13.981
NetJ12_2: J12.2 U7.18 | length 4.2
  Top Layer w0.2: J12.2 40.934,15.125 41.234,14.825 42.4,14.825 42.55,14.675 U7.18
NetJ13_2: J13.2 R50.2 U7.10 | length 6.3
  Top Layer w0.2: U7.10 46.447,12.275 47.5,13.328 47.5,15.008 47.617,15.125 R50.2 48.375,15.15 48.375,16.6 J13.2
NetJ16_1: 
NetJ17_1: 
NetJ19_1: 
NetJ22_2: 
NetJ23_2: 
NetJ26_1: 
NetJ37_2: 
NetJ40_2: 
NetP7_1: 
NetP9_2: 
NetP9_4: 
NetP9_5: 
NetP9_6: 
NetQ1_1: 
NetQ1_2: 
NetQ2_1: 
NetQ2_2: 
NetR7_2: 
NetR25_1: 
NetR36_1: R36.1 R43.1 U7.14 | length 6.7
  Top Layer w0.2: R36.1 R43.1 42.55,17.109 44.544,15.115 U7.14@44.544,13.981
NetR37_1: R37.1 R42.1 U7.11 | length 8.8
  Top Layer w0.2: U7.11 46.381,12.775 47.1,13.494 47.1,15.291 47.5,15.691 47.5,17.051 48.074,17.625 48.4,17.625 48.55,17.775 R37.1 R42.1
NetR38_1: R38.1 R41.2 U7.8 | length 4.5
  Top Layer w0.2: U7.8 47.625,11.275 47.625,11.3 48.35,12.025 R38.1 R41.2
NetR39_1: R39.1 R40.1 U7.7 | length 5.2
  Top Layer w0.2: U7.7 46.45,10.775 47.2,10.025 47.2,9.325 47.4,9.125 R40.1 R39.1
NetR45_2: R45.2 U7.24 | length 5.5
  Top Layer w0.2: R45.2@38.004,7.508 38.1,7.508 38.35,7.758 38.35,8.275 40.85,10.775 U7.24 ; R45.2@38.3,7.73 R45.2@38.304,7.734
NetR54_2: 
NetR59_2: 
NetR60_1: 
NetR63_2: 
NetR97_2: 
NetR99_2: 
NetR101_2: 
NetR103_2: 
NRTS: J9.1 | length 23.2
  Top Layer w0.254: J9.1 v1(39.55,21.157)
  Bottom Layer w0.254: v1(39.55,21.157) 39.55,20.125 40.996,18.679 51.605,18.679 53.048,20.121 54.465,20.121 57.822,23.478
OSC_25M: R44.2 | length 22.4
  Top Layer w0.254: R44.2 v1(49.675,4.825)
  Bottom Layer w0.2: v1(49.675,4.825) 49.694,4.844 49.694,6.103 52.699,9.108 52.699,13.36 53.102,13.763 53.737,13.763 57.539,17.565 57.539,18.932 59.953,21.347
OSC_IN: 
OSC_OUT: 
OTG_FS_VB: 
PDR_ON: 
Port_A0: 
Port_A1: R43.2 | length 19.7
  Top Layer w0.254: R43.2 v1(42.55,21.157)
  Bottom Layer w0.254: v1(42.55,21.157) 42.55,20.025 43.442,19.133 51.417,19.133 52.86,20.575 54.118,20.575 57.421,23.879
Port_A2: J7.1 | length 15.4
  Top Layer w0.254: J7.1 v1(45.55,21.157)
  Bottom Layer w0.254: v1(45.55,21.157) 45.55,20.337 45.846,20.041 51.041,20.041 52.483,21.483 53.741,21.483 56.779,24.521
Port_A3: 
Port_A4: 
Port_A5: 
Port_A6: 
Port_A7: R42.2 | length 9.3
  Top Layer w0.254: R42.2 v1(50.05,21.157)
  Bottom Layer w0.254: v1(50.05,21.157) 51.515,21.157 52.295,21.937 53.553,21.937 56.458,24.842
Port_A8: 
Port_A9: 
Port_A10: 
Port_A11: 
Port_A12: 
Port_A13: 
Port_A14: 
Port_A15: 
Port_B0: 
Port_B1: 
Port_B2: 
Port_B3: 
Port_B4: 
Port_B5: 
Port_B6: 
Port_B7: 
Port_B8: 
Port_B9: 
Port_B10: J13.1 | length 12.5
  Top Layer w0.254: J13.1 v1(51.182,16.625)
  Bottom Layer w0.2: v1(51.182,16.625) 51.757,16.05 53.177,16.05 55.52,18.393 55.52,19.761 58.53,22.77
Port_B11: J10.1 | length 25.2
  Top Layer w0.254: J10.1@38.05,19.925 v1(38.05,21.157)
  Bottom Layer w0.254: v1(38.05,21.157) 38,21.106 38,20.275 40.05,18.225 51.793,18.225 53.236,19.667 54.653,19.667 58.143,23.157
Port_B12: J11.1 | length 27.8
  Top Layer w0.254: v1(36.418,16.625) J11.1
  Bottom Layer w0.2: v1(36.418,16.625) 37.464,15.579 53.271,15.579 55.92,18.228 55.92,19.595 58.812,22.488
Port_B13: J12.1 | length 27.7
  Top Layer w0.254: v1(36.418,15.125) J12.1
  Bottom Layer w0.2: v1(36.418,15.125) 53.383,15.125 56.32,18.062 56.32,19.429 59.095,22.205
Port_B14: 
Port_B15: 
Port_C0: 
Port_C1: J8.1 | length 17.5
  Top Layer w0.254: J8.1 v1(44.05,21.157)
  Bottom Layer w0.254: v1(44.05,21.157) 44.05,20.275 44.738,19.587 51.229,19.587 52.672,21.029 53.929,21.029 57.1,24.2
Port_C2: 
Port_C3: 
Port_C4: R41.1 | length 14.7
  Top Layer w0.254: R41.1 50.65,13.625 50.885,13.39 v1(50.885,12.85)
  Bottom Layer w0.2: v1(50.885,12.85) 52.706,14.671 53.495,14.671 56.72,17.896 56.72,19.264 59.378,21.922
Port_C5: R40.2 | length 18.6
  Top Layer w0.254: R40.2 50.629,9.125 50.885,8.869 v1(50.885,8.55)
  Bottom Layer w0.2: v1(50.885,8.55) 52.2,9.865 52.2,13.522 52.895,14.217 53.606,14.217 57.12,17.731 57.12,19.098 59.661,21.639
Port_C6: 
Port_C7: 
Port_C8: 
Port_C9: 
Port_C10: 
Port_C11: 
Port_C12: 
Port_C13: 
Port_C14: 
Port_C15: 
Port_D0: 
Port_D1: 
Port_D2: 
Port_D3: 
Port_D4: 
Port_D5: 
Port_D6: 
Port_D7: 
Port_D8: 
Port_D9: 
Port_D10: 
Port_D11: 
Port_D12: 
Port_D13: 
Port_D14: 
Port_D15: 
Port_E0: 
Port_E1: 
Port_E2: 
Port_E3: 
Port_E4: 
Port_E5: 
Port_E6: 
Port_E7: 
Port_E8: 
Port_E9: 
Port_E10: 
Port_E11: 
Port_E12: 
Port_E13: 
Port_E14: 
Port_E15: 
Port_F0: 
Port_F1: 
Port_F2: 
Port_F3: 
Port_F4: 
Port_F5: 
Port_F6: 
Port_F7: 
Port_F8: 
Port_F9: 
Port_F10: 
Port_F11: 
Port_F12: 
Port_F13: 
Port_F14: 
Port_F15: 
Port_G0: 
Port_G1: 
Port_G2: 
Port_G3: 
Port_G4: 
Port_G5: 
Port_G6: 
Port_G7: 
Port_G8: 
Port_G9: 
Port_G10: 
Port_G11: 
Port_G12: 
Port_G13: 
Port_G14: 
Port_G15: 
Port_H0: 
Port_H1: 
PWR_EXT: 
SS1: 
SS2: 
STM_JTCK: 
STM_JTMS: 
STM_RST: 
SWout1: 
SWout2: 
T_JRST: 
T_JTCK: 
T_JTDI: 
T_JTDO: 
T_JTMS: 
T_NRST: 
T_SWDIO_IN: 
T_SWO: 
USB_RENUMn: 
VCAP_1: 
VCAP_2: 
VDD: 
VDDA: 
Vref1: 
Vref2: 
VREF+: 
VSSA: 
pads on no net: CON6.9 CON6.15 CON6.16

## Polygon pours and split planes (outlines as drawn)
GND on Top Layer "GND_L01_P108" (solid, pour order 108): 62,0.725 0,0.725 0,2.325 62,2.325
GND on Top Layer "GND_L01_P080" (solid, pour order 80): 62,1.525 53.2,1.525 53.2,10.525 53.474,10.799 62,10.799
GND on Top Layer "GND_L01_P106" (solid, pour order 106): 0,2.325 0,23.725 8,23.725 9.5,22.225 9.5,4.325 11.5,2.325
GND on Top Layer "GND_L01_P086" (solid, pour order 86): 32.4,10.786 33.203,10.786 33.503,10.486 34.303,10.486 34.55,10.733 34.55,12.027 32.4,12.027
GND on Top Layer "GND_L01_P095" (solid, pour order 95): 32.4,21.307 33.203,21.307 33.561,21.307 34.803,20.065 32.4,20.065
GND on Top Layer "GND_L01_P094" (solid, pour order 94): 32.4,2.743 33.203,2.743 33.561,2.743 34.803,3.985 32.4,3.985
GND on Top Layer "GND_L01_P093" (solid, pour order 93): 32.4,5.218 33.203,5.218 33.503,5.518 34.303,5.518 34.803,5.018 34.803,3.976 32.4,3.976
GND on Top Layer "GND_L01_P092" (solid, pour order 92): 32.4,18.832 33.203,18.832 33.503,18.532 34.303,18.532 34.803,19.032 34.803,20.073 32.4,20.073
CT on Top Layer "CT_L01_P091" (solid, pour order 91): 29.353,12.257 29.353,11.807 29.578,11.582 31.103,11.582 31.103,12.482 29.578,12.482
CT on Top Layer "CT_L01_P088" (solid, pour order 88): 31.158,9.331 30.267,9.33 29.353,10.245 29.353,10.72 29.578,10.945 31.103,10.945 31.158,10.89
CT on Top Layer "CT_L01_P087" (solid, pour order 87): 31.158,14.733 30.267,14.734 29.353,13.819 29.353,13.344 29.578,13.119 31.103,13.119 31.158,13.174
GND on Top Layer "GND_L01_P085" (solid, pour order 85): 32.4,13.269 33.203,13.269 33.503,13.569 34.303,13.569 34.55,13.322 34.55,12.027 32.4,12.027
GND on Int1 (GND) (split plane): 62.823,25.798 62.823,0.102 0.102,0.102 0.102,25.798
no net on Int2 (PWR) (split plane): 27.589,21.621 27.589,1.077 0.102,1.077 0.102,23.073 26.137,23.073
no net on Int2 (PWR) (split plane): 62.823,25.798 62.823,0.102 0.102,0.102 0.102,0.573 56.4,0.573 56.465,0.581 56.526,0.607 56.578,0.647 56.618,0.699 56.644,0.76 56.652,0.825 56.652,12.898 62.2,12.898 62.265,12.906 62.326,12.932 62.378,12.972 62.418,13.024 62.444,13.085 62.452,13.15 62.444,13.215 62.418,13.276 62.378,13.328 62.326,13.368 62.265,13.394 62.2,13.402 55.071,13.402 55.006,13.394 54.945,13.368 54.893,13.328 49.665,8.101 44.981,8.101 41.752,11.33 41.752,17.225 41.744,17.29 41.718,17.351 41.678,17.403 38.852,20.229 38.852,21.473 53.796,21.473 58.622,16.647 58.644,16.629 58.674,16.607 58.735,16.581 58.8,16.573 60.339,16.573 60.405,16.581 60.466,16.607 60.518,16.647 61.478,17.607 61.518,17.659 61.544,17.72 61.552,17.786 61.552,20.525 61.544,20.59 61.518,20.651 61.478,20.703 61.426,20.743 61.365,20.769 61.3,20.777 61.235,20.769 61.174,20.743 61.122,20.703 61.082,20.651 61.056,20.59 61.048,20.525 61.048,17.89 60.235,17.077 58.904,17.077 54.078,21.903 54.026,21.943 53.965,21.969 53.9,21.977 27.946,21.977 26.419,23.503 26.367,23.543 26.306,23.569 26.241,23.577 0.102,23.577 0.102,25.798
CT on Int2 (PWR) (split plane): 38.348,20.125 38.356,20.06 38.382,19.999 38.422,19.947 41.248,17.121 41.248,11.225 41.256,11.16 41.282,11.099 41.322,11.047 44.698,7.67 44.721,7.653 44.75,7.63 44.811,7.605 44.876,7.597 49.77,7.597 49.835,7.605 49.896,7.63 49.948,7.67 55.175,12.898 56.148,12.898 56.148,1.077 28.093,1.077 28.093,21.473 38.348,21.473

## Other copper
Int2 (PWR) (plane layer: these items are gaps in the copper):
  lines w0.5: 0,0.825 27.841,0.825 ; 0,23.325 1.1,23.325 26.241,23.325 27.841,21.725 ; 35.8,0.825 27.841,0.825 ; 38.6,21.725 38.6,20.125 41.5,17.225 41.5,11.225 44.876,7.849 49.77,7.849 55.071,13.15 56.415,13.15 ; 61.3,20.525 61.3,17.786 60.339,16.825 58.8,16.825 53.9,21.725 27.841,21.725 ; 62.2,13.15 56.4,13.15 56.4,0.825 27.841,0.825 ; 27.841,0.825 27.841,21.725